# Altium PCB breaker.PcbDoc (part 1 of 2)
Units mil, origin at the board's own origin, x right, y up, seen from the top; angles counter-clockwise.
Board outline 1955 x 4025 mil, 2 copper layers (Top Layer, Bottom Layer); 93 components, 54 nets, 301 pads, 212 vias.
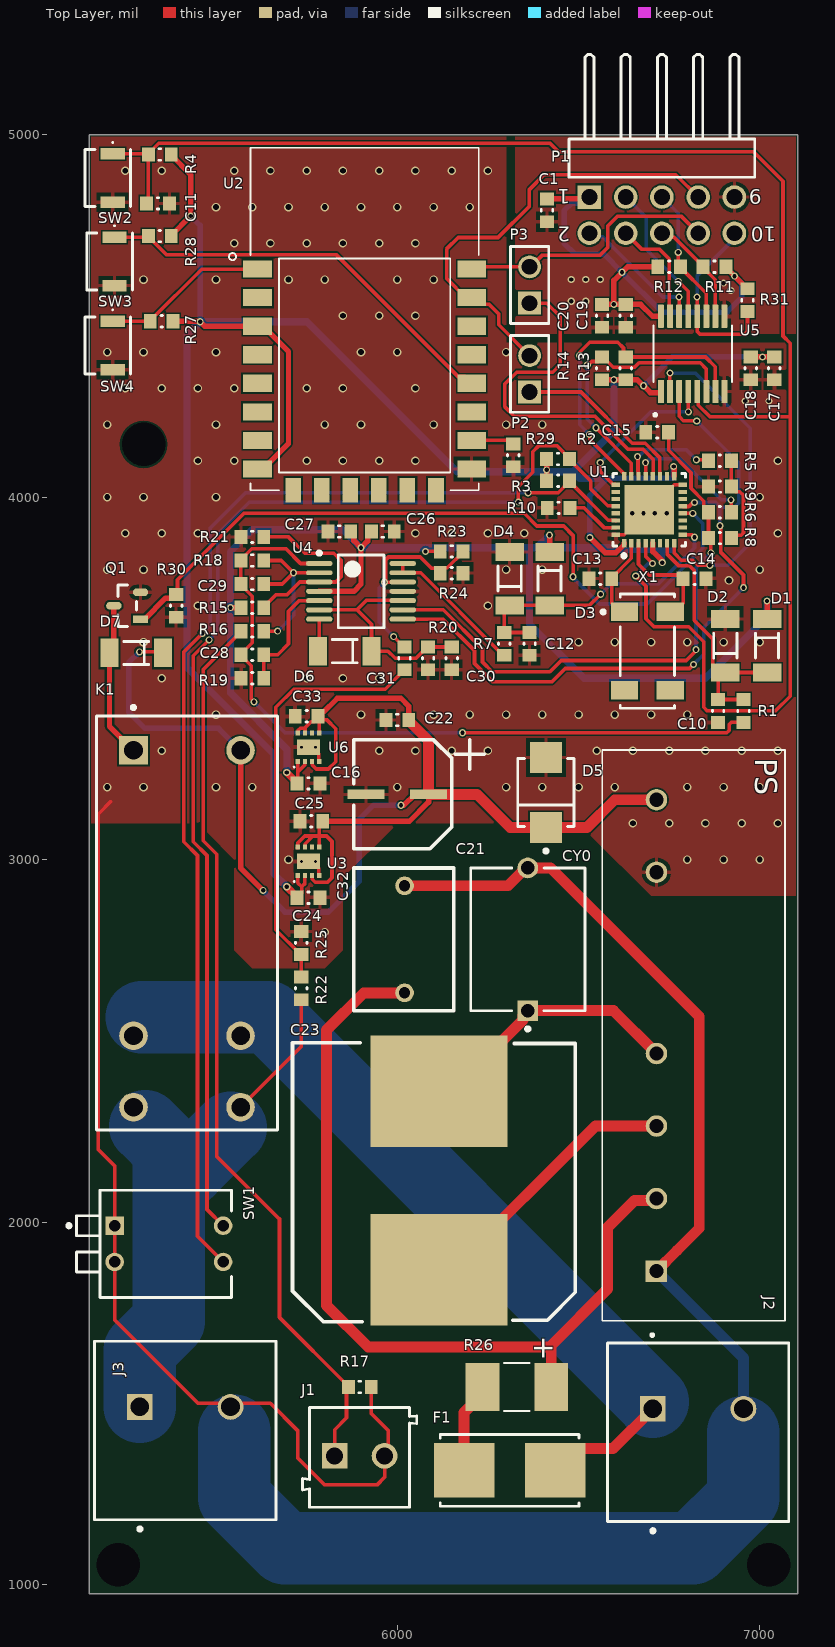
[diagram p0: Top Layer view]
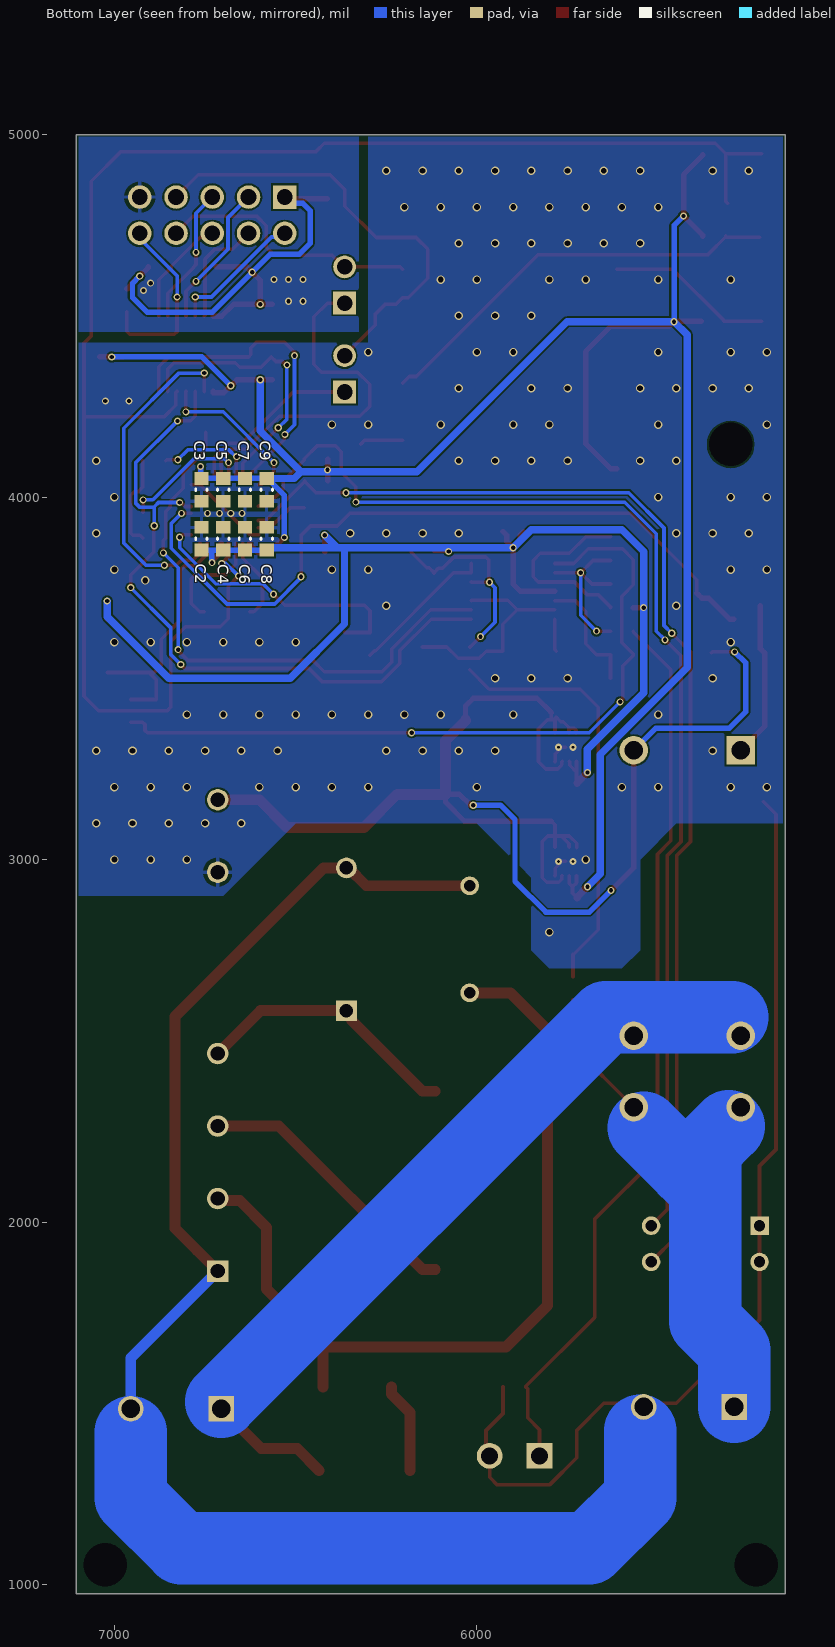
[diagram p1: Bottom Layer view, seen from below]

## Layer stack, top to bottom
Top Solder: solder mask 0.4, Solder Resist, Dk 3.5
Top Layer: signal copper 1.4
Dielectric 1: dielectric 12.6, FR-4, Dk 4.8
Bottom Layer: signal copper 1.4
Bottom Solder: solder mask 0.4, Solder Resist, Dk 3.5

## Board outline
5150,975 7105,975 7105,5000 5150,5000

## Design rules (kind name [scope] priority, off if disabled: settings)
BoardOutlineClearance [All] p1: gap=6 ignorepadtopadclearanceinfootprint=FALSE
Clearance [All] p1: gap=5 ignorepadtopadclearanceinfootprint=FALSE
HoleSize [All] p1: absolutevalues=TRUE maxlimit=3937.01 minlimit=11.81 maxpercent=80.000 minpercent=20.000
MinimumSolderMaskSliver [All] p1: minsoldermaskwidth=0
PolygonConnect [All] p1: thpad.connectstyle=Relief thpad.reliefconductorwidth=10 thpad.reliefentries=4 thpad.polygonreliefangle="90 Angle" thpad.airgapwidth=10 smdpad.connectstyle=Relief smdpad.reliefconductorwidth=10 smdpad.reliefentries=4 smdpad.polygonreliefangle="90 Angle" smdpad.airgapwidth=10 via.connectstyle=Direct via.reliefconductorwidth=10 via.reliefentries=4 via.polygonreliefangle="90 Angle" via.airgapwidth=10
RoutingVias [All] p1: holewidth=28 width=50 viastyle="Through Hole" minholewidth=0 minwidth=0 maxholewidth=28 maxwidth=50
SilkToSilkClearance [All] p1: silktosilkclearance=0
SilkToSolderMaskClearance [IsPad] p1: minsilkscreentomaskgap=2 clearancetoexposedcopper=TRUE
SolderMaskExpansion [All] p1: expansion=4 istentingtop=FALSE
Width [All] p1: maxlimit=500 minlimit=6 preferedwidth=10
26 further rules are at their usual default settings.

## Classes and differential pairs
component class power: C16 C21 C22 C23 C24 C25 C32 C33 CY0 D5 F1 PS R U3
component class controller: C1 C2 C3 C4 C5 C6 C7 C8 C9 C10 C11 C12 C13 C14 C15 C17 C18 C19 C20 D1 D2 D3 D4 P1 P2 P3 R1 R2 R3 R4 R5 R6 R7 R8 R9 R10 R11 R12 R13 R14 R27 R28 R29 SW1 SW2 SW3 SW4 U1 U5 X1
component class circuit_breaker: C26 C27 C28 C29 C30 C31 D6 D7 J1 J3 K1 Q1 R15 R16 R17 R18 R19 R20 R21 R22 R23 R24 R25 R30 U4

## Components (designator, comment, footprint, x,y, rotation, side; value= is the part's Value field where it differs from the comment)
C1 "06033C102JAT2A" 0603C 6413,4791 r90 top value=1000pF
C2 "0603YD105MAT2A" 0603C 6760,3885 r90 bottom value=1uF
C3 "0603YD105MAT2A" 0603C 6760,4020 r270 bottom value=1uF
C4 "06033C104K4T4A" 0603C 6700,3885 r90 bottom value=0.1uF
C5 "06033C104K4T4A" 0603C 6700,4020 r270 bottom value=0.1uF
C6 "06033C102JAT2A" 0603C 6640,3885 r270 bottom value=1000pF
C7 "06033C102JAT2A" 0603C 6640,4020 r90 bottom value=1000pF
C8 "06033A101FAT2A" 0603C 6580,3885 r90 bottom value=100pF
C9 "06033A101FAT2A" 0603C 6580,4020 r270 bottom value=100pF
C10 "06033C102JAT2A" 0603C 6885,3410 r90 top value=1000pF
C11 "06033C104K4T4A" 0603C 5340,4810 r180 top value=0.1uF
C12 "06033C102JAT2A" 0603C 6365,3595 r90 top value=1000pF
C13 "06032U4R3BAT2A" 0603C 6560,3775 r0 top value=4.3pF
C14 "06032U4R3BAT2A" 0603C 6820,3775 r180 top value=4.3pF
C15 "06033C102JAT2A" 0603C 6717,4179 r0 top value=1000pF
C16 "0603YD105MAT2A" 0603C 5755,3210 r180 top value=1uF
C17 "0603YD105MAT2A" 0603C 7040,4355 r270 top value=1uF
C18 "06033C104K4T4A" 0603C 6975,4355 r270 top value=0.1uF
C19 "0603YD105MAT2A" 0603C 6630,4500 r90 top value=1uF
C20 "06033C104K4T4A" 0603C 6565,4500 r90 top value=0.1uF
C21 "EXV227M016A9HAA" small_boi 6000,3180 r0 top value=220uF
C22 "06033C104K4T4A" 0603C 6000,3385 r0 top value=0.1uF
C23 "MAL215299704E3" PCBComponent_1 6115,2115 r270 top value=10uF
C24 "0603YD105MAT2A" 0603C 5755,2895 r180 top value=1uF
C25 "0603YD105MAT2A" 0603C 5762.78,3105.68 r0 top value=1uF
C26 "0603YD105MAT2A" 0603C 5960,3905 r180 top value=1uF
C27 "06033C104K4T4A" 0603C 5840,3905 r180 top value=0.1uF
C28 "0603YD105MAT2A" 0603C 5600,3565 r0 top value=1uF
C29 "CC0603KRNPO9BN470" 0603C 5600,3760 r180 top value=47pF
C30 "06033C104K4T4A" 0603C 6150,3555 r90 top value=0.1uF
C31 "0603YD105MAT2A" 0603C 6020,3555 r90 top value=1uF
C32 "104MKP275KC" 1.083FILM 6020,2780 r270 top value=0.1uF
C33 "0603YD105MAT2A" 0603C 5750,3395 r0 top value=1uF
CY0 "C941U102KVYDCA7317" MURA-DE1E3KX222MA5 6360,2780 r90 top
D1 "TMMBAT48FILM" FP-MINIMELF-MFG 7020,3590 r270 top value=20pF
D2 "TMMBAT48FILM" FP-MINIMELF-MFG 6905,3590 r90 top value=20pF
D3 "TMMBAT48FILM" FP-MINIMELF-MFG 6420,3775 r270 top value=20pF
D4 "TMMBAT48FILM" FP-MINIMELF-MFG 6310,3775 r90 top value=20pF
D5 "SMBJ7.0A" FP-SMBJ-MFG 6410,3185 r90 top
D6 "TMMBAT48FILM" FP-MINIMELF-MFG 5855,3575 r180 top value=20pF
D7 "TMMBAT48FILM" FP-MINIMELF-MFG 5280,3570 r180 top value=20pF
F1 "0154.250DR" FP-0154-MFG 6310,1315 r180 top
J1 "691103110002" 691103110002 5896.1,1351.06 r0 top
J2 "1714955" PHOE-1714955_V 6830,1485 r0 top
J3 "1714955" PHOE-1714955_V 5415,1490 r0 top
K1 "G2RL-1A-E2-CV-HA DC5" FP-G2RL-1A-E2-CV-HA-MFG 5420,2825 r270 top
P1 "61301021021" 61301021021 6730,4935 r180 top
P2 "61300211121" 61300211121 6365,4340 r90 top
P3 "61300211121" 61300211121 6365,4585 r90 top
PS "PBO-5-S5" CONV_PBO-5-S5 6715,2515 r90 top
Q1 "NDS355AN" FP-527AG-01-IPC_C 5255,3700 r180 top
R1 "ERA-3AEB221V" 0603R 6955,3410 r270 top value=220
R2 "ERA-3ARB103V" 0603R 6443.5,4105 r180 top value=10k
R3 "ERA-3ARB103V" 0603R 6443.5,4045 r180 top value=10k
R4 "ERA-3ARB103V" 0603R 5345,4945 r0 top value=10k
R5 "ERA-3ARW202V" 0603R 6890,4100 r180 top value=2k
R6 "ERA-3ARW202V" 0603R 6890,3957.93 r0 top value=2k
R7 "ERA-3AEB221V" 0603R 6295,3595 r270 top value=220
R8 "ERJ-PB3D1001V" 0603R 6890,3886.9 r0 top value=1k
R9 "ERA-3ARW202V" 0603R 6890,4028.97 r180 top value=2k
R10 "ERA-3ARB103V" 0603R 6445,3970 r0 top value=10k
R11 "ERA-3ARW202V" 0603R 6875,4635 r0 top value=2k
R12 "ERA-3ARW202V" 0603R 6750,4635 r180 top value=2k
R13 "ERA-3ARW202V" 0603R 6630,4355 r270 top value=2k
R14 "ERA-3ARW202V" 0603R 6565,4355 r270 top value=2k
R15 "ERA-3APB302V" 0603R 5600,3695 r180 top value=3k
R16 "ERA-3ARB103V" 0603R 5600,3630 r0 top value=10k
R17 "RMCF0603JT22R0" 0603R 5896.5,1545 r180 top value=22
R18 "ERA-3ARB103V" 0603R 5600,3825 r180 top value=10k
R19 "ERA-3ARB103V" 0603R 5600,3500 r0 top value=10k
R20 "ERJ-PB3D1001V" 0603R 6085,3555 r90 top value=1k
R21 "ERJ-PB3D1001V" 0603R 5600,3890 r0 top value=1k
R22 "ERJ-3GEYJ105V" 0603R 5735,2645 r270 top value=1M
R23 "ERJ-3GEYJ105V" 0603R 6150,3850 r180 top value=1M
R24 "ERJ-3GEYJ105V" 0603R 6150,3790 r180 top value=1M
R25 "ERJ-3EKF1692V" 0603R 5735,2770 r270 top value=6.9k
R26 "352212RJT" RESC6332X120N 6330,1545 r0 top
R27 "ERA-3ARB103V" 0603R 5350,4485 r0 top value=10k
R28 "ERA-3ARB103V" 0603R 5345,4720 r0 top value=10k
R29 "ERA-3ARB103V" 0603R 6320,4115 r90 top value=10k
R30 "ERA-3ARB103V" 0603R 5390,3700 r90 top value=10k
R31 "ERA-3ARB103V" 0603R 6966,4543 r90 top value=10k
SW1 "1571999-1" FP-1571999-1-MFG 5370,1940 r0 top
SW2 "B3U-3000P" OMRON-B3U-3000P_V 5215,4880 r270 top
SW3 "B3U-3000P" OMRON-B3U-3000P_V 5220,4650 r270 top
SW4 "B3U-3000P" OMRON-B3U-3000P_V 5215,4418.07 r270 top
U1 "STM32L412KBU6" FP-UFQFPN32-A0B8-MFG 6695,3965 r90 top
U2 "ESP8266-12E/ESP-12E" XCVR_ESP8266-12E/ESP-12E 5909.72,4353.15 r0 top
U3 "ADP124ACPZ-3.3-R7" ADI-CP-8-8_V 5755,2995 r90 top
U4 "AD8604ARUZ" ADI-RU-14_M 5900,3740 r0 top
U5 "MAX14850AEE+" SOP63P602X175-16N 6815,4395 r90 top
U6 "ADP124ACPZ-3.3-R7" ADI-CP-8-8_V 5755,3310 r90 top
X1 "ABS25-32.768KHZ-6-T" ABRA-ABS25-4_V 6690,3575 r270 top

## Footprints (in the part's own frame and the unit in brackets; to place one, negate y for a bottom-side part, rotate by r counter-clockwise, add the part's x,y. Pads: shape width x height; smd on the part's side, far side on the other; paste and mask are expansions set on the pad)
1.083FILM [mm]
  round 1.308 hole 0.8: 1(-3.75,0) 2(3.75,0)
  silkscreen extent -5,-3.56 5,3.44
0603C [mm] "Chip Capacitor, Body 1.6x0.8mm, Height 1.0mm, IPC Medium Density"
  rect 0.9x1 smd: 1(-0.8,0) 2(0.8,0)
  silkscreen extent -0.05,-0.4 0.05,0.4, body extent -0.87,-0.48 0.88,0.47, height 1
0603R [mm] "Chip Resistor, Body 1.6x0.8mm, IPC Medium Density"
  rect 0.9x1 smd: 1(-0.8,0) 2(0.8,0)
  silkscreen extent -0.05,-0.4 0.05,0.4, body extent -0.85,-0.47 0.85,0.47, height 0.6
61300211121 [mm] "Pin Header, pitch 2.54 mm, THT, Vertical, single row, 2p"
  rect 1.6x1.6 hole 1.1: 1(-1.27,0)
  round 1.6 hole 1.1: 2(1.27,0)
  silkscreen extent -2.69,-1.35 2.69,1.35, body extent -2.54,-1.27 2.54,1.27, height 8.57
61301021021 [mm] "Pin Header, pitch 2.54 mm, THT, Angled, dual row, 10p"
  rect 1.65x1.65 hole 1.1: 1(5.08,2.73)
  round 1.65 hole 1.1: 2(5.08,5.27) 3(2.54,2.73) 4(2.54,5.27) 5(0,2.73) 6(0,5.27) 7(-2.54,2.73) 8(-2.54,5.27) 9(-5.08,2.73) 10(-5.08,5.27)
  silkscreen extent -6.5,-7.27 6.5,1.35, body extent -6.35,-7.27 6.35,5.63, height 5.12
691103110002 [mm] "3,50mm - modular - blue - Horizontal wire entry - Pressure clamp - 8,4mm height - 02p"
  rect 1.8x1.8 hole 1.2: 1(-1.75,0.1)
  round 1.8 hole 1.2: 2(1.75,0.1)
  silkscreen extent -4,-3.5 4,3.5, body extent -4,-3.5 4,3.5, height 8.45
ABRA-ABS25-4_V [mm] "SMD, 4-Leads, Body 8x3.8mm, Pitch 5.5mm, Height 2.5mm"
  rect 1.3x1.9 smd: 1(-2.75,-1.6) 2(2.75,-1.6) 3(2.75,1.6) 4(-2.75,1.6)
  silkscreen extent -4,-3.22 4,1.9, body extent -4,-2 4,2, height 2.66
ADI-CP-8-8_V [mm] "SON, 8-Leads, Body 2x2mm, Pitch 0.5mm, Thermal Pad 1.6x1mm"
  rect 0.35x0.3 smd: 1(-1,0.75) 2(-1,0.25) 3(-1,-0.25) 4(-1,-0.75) 5(1,-0.75) 6(1,-0.25) 7(1,0.25) 8(1,0.75)
  rect 1.1x1.6 smd: 9(0,0)
  silkscreen extent -1.45,0.95 -1.35,1.05, body extent -1,-1 1,1, height 0.65
ADI-RU-14_M [mm] "SOP, 14-Leads, Body 5x4.4mm, Pitch 0.65mm, IPC Low Density"
  oval 1.85x0.35 smd: 1(-2.925,1.95) 2(-2.925,1.3) 3(-2.925,0.65) 4(-2.925,0) 5(-2.925,-0.65) 6(-2.925,-1.3) 7(-2.925,-1.95) 8(2.925,-1.95) 9(2.925,-1.3) 10(2.925,-0.65) 11(2.925,0) 12(2.925,0.65) 13(2.925,1.3) 14(2.925,1.95)
  silkscreen extent -3.05,-2.55 1.6,2.8, body extent -2.25,-2.55 2.25,2.55, height 1.2
CONV_PBO-5-S5 [mm]
  rect 1.508x1.508 hole 1: 1(-16.51,0)
  round 1.508 hole 1: 3(-11.43,0) 5(-6.35,0) 7(-1.27,0) 12(11.43,0) 14(16.51,0)
  silkscreen extent -21.1,-9 20,3.8
FP-0154-MFG [mil]
  rect 167x150 smd paste+0 mask+0: 1(-125.5,0) 2(125.5,0)
  silkscreen extent -192,-99 192,99, body extent -213,-103 213,103, height 10
FP-527AG-01-IPC_C [mm]
  rect 1.075x0.538 smd paste+0 mask+0: 1(-0.935,0.95)
  rrect100% 1.075x0.538 smd paste+0 mask+0: 2(-0.935,-0.95) 3(0.935,0)
  silkscreen extent -0.65,-1.46 0.65,1.46, body extent -1.2,-1.46 1.2,1.44, height 1.11
FP-1571999-1-MFG [mm]
  rect 1.3x1.3 hole 0.8 paste-1000 mask+0: 1(-3.8,1.27)
  round 1.3 hole 0.8 paste-1000 mask+0: 2(-3.8,-1.27) 3(3.8,-1.27) 4(3.8,1.27)
  silkscreen extent -7.13,-3.75 4.39,3.75, body extent -6.59,-3.85 4.55,3.85, height 0.25
FP-G2RL-1A-E2-CV-HA-MFG [mm]
  rect 2x2 hole 1.3 paste-1000 mask+0: 1(-12.1,-3.75)
  round 2 hole 1.3 paste-1000 mask+0: 3(7.9,-3.75) 4(12.9,-3.75) 5(12.9,3.75) 6(7.9,3.75) 8(-12.1,3.75)
  silkscreen extent -15.22,-6.35 14.5,6.35, body extent -14.6,-6.45 14.6,6.45, height 0.25
FP-MINIMELF-MFG [mm]
  rect 1.25x2 smd paste+0 mask+0: 1(-1.875,0) 2(1.875,0)
  silkscreen extent -0.87,-0.81 0.87,0.81, body extent -2.6,-1.1 2.6,1.1, height 0.25
FP-SMBJ-MFG [mm]
  rect 2.16x2.26 smd paste+0 mask+0: 1(-2.45,0) 2(2.45,0)
  silkscreen extent -4.22,-1.97 2.37,1.97, body extent -3.63,-2.07 3.63,2.07, height 0.25
FP-UFQFPN32-A0B8-MFG [mm]
  rect 0.6x0.3 smd paste+0 mask+0: 1(-2.35,1.75) 2(-2.35,1.25) 3(-2.35,0.75) 4(-2.35,0.25) 5(-2.35,-0.25) 6(-2.35,-0.75) 7(-2.35,-1.25) 8(-2.35,-1.75) 17(2.35,-1.75) 18(2.35,-1.25) 19(2.35,-0.75) 20(2.35,-0.25) 21(2.35,0.25) 22(2.35,0.75) 23(2.35,1.25) 24(2.35,1.75)
  rect 0.3x0.6 smd paste+0 mask+0: 9(-1.75,-2.35) 10(-1.25,-2.35) 11(-0.75,-2.35) 12(-0.25,-2.35) 13(0.25,-2.35) 14(0.75,-2.35) 15(1.25,-2.35) 16(1.75,-2.35) 25(1.75,2.35) 26(1.25,2.35) 27(0.75,2.35) 28(0.25,2.35) 29(-0.25,2.35) 30(-0.75,2.35) 31(-1.25,2.35) 32(-1.75,2.35)
  rect 3.45x3.45 smd paste+0 mask+0: 33(0,0)
  silkscreen extent -3.35,-2.55 2.55,2.55, body extent -2.75,-2.75 2.75,2.75, height 0.25
MURA-DE1E3KX222MA5 [mm] "THD, 2-Leads, Dia 10mm"
  rect 1.45x1.45 hole 0.95: 1(-5,0)
  round 1.45 hole 0.95: 2(5,0)
  silkscreen extent -6.4,-4 5,4, body extent -5,-4 5,4, height 14
OMRON-B3U-3000P_V [mm] "SMD, 2-Leads, Body 4x3.2mm"
  rect 0.8x1.7 smd: 1(-1.7,0) 2(1.7,0)
  silkscreen extent -2.55,-1.95 2,1.25, body extent -2,-1.95 2,1.25, height 1.2
PCBComponent_1 [mm]
  rect 7.8x9.6 smd: 1(6.25,0) 2(-6.25,0)
  silkscreen extent -9.64,-10.26 9.89,9.55
PHOE-1714955_V [mm] "Terminal Block, 2-Leads, Body 12.7x12.5mm, Pitch 6.35mm"
  rect 1.8x1.8 hole 1.3: 1(-3.175,0)
  round 1.8 hole 1.3: 2(3.175,0)
  silkscreen extent -6.35,-8.67 6.35,4.6, body extent -6.92,-7.9 6.35,4.6, height 21.51
RESC6332X120N [mm]
  rect 2.37x3.37 smd: 1(-2.405,0) 2(2.405,0)
  silkscreen extent -0.9,-1.68 0.9,1.68
small_boi [mm]
  rect 2.6x0.65 smd: 1(2.2,0) 2(-2.2,0)
  silkscreen extent -3.05,-3.81 6.1,3.81
SOP63P602X175-16N [mm]
  rrect25% 1.64x0.41 smd: 1(-2.635,2.222) 2(-2.635,1.587) 3(-2.635,0.952) 4(-2.635,0.317) 5(-2.635,-0.318) 6(-2.635,-0.953) 7(-2.635,-1.588) 8(-2.635,-2.222) 9(2.635,-2.222) 10(2.635,-1.587) 11(2.635,-0.952) 12(2.635,-0.317) 13(2.635,0.318) 14(2.635,0.953) 15(2.635,1.588) 16(2.635,2.222)
  silkscreen extent -4.37,-2.75 1.99,2.75
XCVR_ESP8266-12E/ESP-12E [mm]
  rect 2x1.2 smd: 1(-7.5,7) 2(-7.5,5) 3(-7.5,3) 4(-7.5,1) 5(-7.5,-1) 6(-7.5,-3) 7(-7.5,-5) 8(-7.5,-7) 15(7.5,-7) 16(7.5,-5) 17(7.5,-3) 18(7.5,-1) 19(7.5,1) 20(7.5,3) 21(7.5,5) 22(7.5,7)
  rect 1.1x1.7 smd: 9(-5,-8.5) 10(-3,-8.5) 11(-1,-8.5) 12(1,-8.5) 13(3,-8.5) 14(5,-8.5)
  silkscreen extent -9.5,-8.5 8,15.5, body extent -8,-8.51 8,15.49, height 3

## Part data
C1 C6 C7 C10 C12 C15: "0603 1 nF 25 V ±5 % Tolerance X7R Surface Mount Multilayer Ceramic Capacitor", Capacitance=1nF, Case Code (Imperial)=0603, Case Code (Metric)=1608, Dielectric=X7R, Manufacturer="Kyocera AVX", Max Operating Temperature=125°C, Min Operating Temperature=-55°C, Package Quantity=1, Supplier Part Number 1=478-10673-1-ND, Tolerance=5%, Voltage Rating=25V, Case/Package=0603, Category="Ceramic Capacitors", ComponentLink1Description=https://datasheet.ciiva.com/206/cx7r-206114.pdf?src-supplier=Digi-Key, ComponentLink1URL=https://datasheet.ciiva.com/206/cx7r-206114.pdf?src-supplier=Digi-Key, ComponentLink2Description=https://datasheet.ciiva.com/14886/cx7r-14886873.pdf?src-supplier=Digi-Key, ComponentLink2URL=https://datasheet.ciiva.com/14886/cx7r-14886873.pdf?src-supplier=Digi-Key, ComponentLink3Description=https://datasheet.ciiva.com/14886/cx7r-14886874.pdf?src-supplier=Digi-Key, ComponentLink3URL=https://datasheet.ciiva.com/14886/cx7r-14886874.pdf?src-supplier=Digi-Key, ComponentLink4Description=https://datasheet.ciiva.com/5422/cx7r-218113-5422101.pdf?src-supplier=Mouser, ComponentLink4URL=https://datasheet.ciiva.com/5422/cx7r-218113-5422101.pdf?src-supplier=Mouser, ComponentLink5Description=https://datasheet.ciiva.com/16327/cx7r-16327167.pdf?src-supplier=Future+Electronics, ComponentLink5URL=https://datasheet.ciiva.com/16327/cx7r-16327167.pdf?src-supplier=Future+Electronics, Construction=Flat, Depth=0.81mm, Lead Free="Lead Free", Length=1.6mm, Manufacturer Part Number=06033C102JAT2A, Mount="Surface Mount", Number of Pins=2, Packaging="Tape and Reel", Pricing 2="1=0.27000, 10=0.18600, 50=0.12420, 100=0.10560, 500=0.07452, 1000=0.06520 (USD)", REACH SVHC=Unknown, RoHS=Yes, RoHS Compliant=Yes, Series=-, Stock 2=72865, Supplier 2=Digi-Key, Supplier Part Number 2=478-7900-1-ND, Termination=SMD/SMT, Thickness=0.035inch, Voltage Rating (DC)=25V, Width=0.032inch
C2 C3 C17 C19: "AVX - 0603YD105MAT2A - Keramikvielschichtkondensator, SMD, 1 µF, 16 V, 0603 [Metrisch 1608], ± 20%, X5R, AVX 0603 MLCC", Capacitance=1uF, Case Code (Imperial)=0603, Case Code (Metric)=1608, Dielectric=X5R, Manufacturer="Kyocera AVX", Max Operating Temperature=85°C, Min Operating Temperature=-55°C, Package Quantity=4000, Supplier Part Number 1=478-10673-1-ND, Tolerance=20%, Voltage Rating=16V, Case/Package=0603, Category="Ceramic Capacitors", ComponentLink1Description=https://datasheet.ciiva.com/151/cx5r-151029.pdf?src-supplier=Digi-Key, ComponentLink1URL=https://datasheet.ciiva.com/151/cx5r-151029.pdf?src-supplier=Digi-Key, ComponentLink2Description=https://datasheet.ciiva.com/151/cx5r-151030.pdf?src-supplier=Digi-Key, ComponentLink2URL=https://datasheet.ciiva.com/151/cx5r-151030.pdf?src-supplier=Digi-Key, ComponentLink3Description=https://datasheet.ciiva.com/151/cx5r-151031.pdf?src-supplier=Digi-Key, ComponentLink3URL=https://datasheet.ciiva.com/151/cx5r-151031.pdf?src-supplier=Digi-Key, ComponentLink4Description=https://datasheet.ciiva.com/22682/1666675-22682860.pdf?src-supplier=Element14, ComponentLink4URL=https://datasheet.ciiva.com/22682/1666675-22682860.pdf?src-supplier=Element14, ComponentLink5Description=https://datasheet.ciiva.com/28586/1666675-28586031.pdf?src-supplier=Element14, ComponentLink5URL=https://datasheet.ciiva.com/28586/1666675-28586031.pdf?src-supplier=Element14, Construction=Flat, Depth=0.81mm, Dissipation Factor=3.5%, Height=0.9mm, Lead Free="Lead Free", Length=1.6mm, Manufacturer Part Number=0603YD105MAT2A, Mount="Surface Mount", Number of Pins=2, Packaging="Tape and Reel", Pricing 2="1=0.17000, 10=0.12100, 50=0.06880, 100=0.05700, 500=0.03998, 1000=0.03310 (USD)", Radiation Hardening=No, REACH SVHC="No SVHC", RoHS=Yes, RoHS Compliant=Yes, Series=-, Stock 2=32400, Supplier 2=Digi-Key, Supplier Part Number 2=478-5319-1-ND, Termination=SMD/SMT, Thickness=0.035inch, Voltage Rating (DC)=16V, Width=0.032inch
C4 C5 C11 C18 C20 C22 C27 C30: "Cap Ceramic 0.1uF 25V X7R 10% Pad SMD 0603 125C Automotive T/R", Capacitance=100nF, Case/Package=0603, Dielectric=X7R, Manufacturer="Kyocera AVX", Max Operating Temperature=125°C, Min Operating Temperature=-55°C, Supplier Part Number 1=478-10673-1-ND, Tolerance=10%, Voltage Rating (DC)=25V, Category="Ceramic Capacitors", ComponentLink1Description=https://datasheet.ciiva.com/11503/cauto-11503964.pdf?src-supplier=Avnet, ComponentLink1URL=https://datasheet.ciiva.com/11503/cauto-11503964.pdf?src-supplier=Avnet, Construction=Flat, Depth=0.81mm, Length=1.6mm, Manufacturer Part Number=06033C104K4T4A, Mount="Surface Mount", Packaging="Tape and Reel", Pricing 2="1=0.15000, 10=0.11000, 50=0.06220, 100=0.05150, 500=0.03612, 1000=0.02991, 2500=0.02784, 5000=0.02547 (USD)", RoHS=Yes, Stock 2=4996, Supplier 2=Digi-Key
C8 C9: "Multilayer Ceramic Capacitors MLCC - SMD/SMT 25V 100pF C0G 0603 1% Tol", Capacitance=100pF, Case Code (Imperial)=0603, Case Code (Metric)=1608, Dielectric=C0G, Manufacturer="Kyocera AVX", Max Operating Temperature=125°C, Min Operating Temperature=-55°C, Package Quantity=4000, Supplier Part Number 1=478-10673-1-ND, Tolerance=1%, Voltage Rating=25V, Case/Package=0603, Category="Ceramic Capacitors", ComponentLink1Description=https://datasheet.ciiva.com/209/ccog-209628.pdf?src-supplier=Digi-Key, ComponentLink1URL=https://datasheet.ciiva.com/209/ccog-209628.pdf?src-supplier=Digi-Key, Construction=Flat, Depth=0.81mm, Height=0.13mm, Length=1.6mm, Manufacturer Part Number=06033A101FAT2A, Mount="Surface Mount", Packaging="Tape and Reel", Pricing 2="1=0.50000, 10=0.34500, 50=0.24160, 100=0.20700, 500=0.15524, 1000=0.13110 (USD)", Radiation Hardening=No, RoHS=Yes, RoHS Compliant=Yes, Series=0603, Stock 2=17449, Supplier 2=Digi-Key, Supplier Part Number 2=478-06033A101FAT2ACT-ND, Termination=SMD/SMT, Thickness=0.035inch, Voltage Rating (DC)=25V, Weight=7.1E-05oz, Width=0.81mm
C13 C14: "CAP CER 4.3PF 200V NP0 0603", Capacitance=4.3pF, Case Code (Imperial)=0603, Case Code (Metric)=1608, Dielectric=C0G, Manufacturer="Kyocera AVX", Max Operating Temperature=125°C, Min Operating Temperature=-55°C, Package Quantity=8000, Resistor Type=Ceramic, Supplier Part Number 1=478-10673-1-ND, Voltage Rating=200V, Case/Package=0603, Category="Ceramic Capacitors", ComponentLink1Description=https://datasheet.ciiva.com/207/useries-207438.pdf?src-supplier=Digi-Key, ComponentLink1URL=https://datasheet.ciiva.com/207/useries-207438.pdf?src-supplier=Digi-Key, ComponentLink2Description=https://datasheet.ciiva.com/11570/useries-11570909.pdf?src-supplier=Avnet, ComponentLink2URL=https://datasheet.ciiva.com/11570/useries-11570909.pdf?src-supplier=Avnet, Construction=Flat, Depth=0.76mm, Length=0.06inch, Manufacturer Part Number=06032U4R3BAT2A, Mount="Surface Mount", Packaging="Tape and Reel", Pricing 2="1=0.35000, 10=0.24200, 50=0.16100, 100=0.13680, 500=0.09660, 1000=0.08452 (USD)", Radiation Hardening=No, RoHS=Yes, RoHS Compliant=Yes, Series=U, Stock 2=15764, Supplier 2=Digi-Key, Supplier Part Number 2=478-10269-1-ND, Termination=SMD/SMT, Thickness=0.036inch, Voltage Rating (DC)=200V, Width=0.81mm
C16 C24 C25 C26 C28 C31 C33: "AVX - 0603YD105MAT2A - Keramikvielschichtkondensator, SMD, 1 µF, 16 V, 0603 [Metrisch 1608], ± 20%, X5R, AVX 0603 MLCC", Capacitance=1uF, Case Code (Imperial)=0603, Case Code (Metric)=1608, Dielectric=X5R, Manufacturer="Kyocera AVX", Max Operating Temperature=85°C, Min Operating Temperature=-55°C, Package Quantity=4000, Supplier Part Number 1=478-5319-1-ND, Tolerance=20%, Voltage Rating=16V, Case/Package=0603, Category="Ceramic Capacitors", ComponentLink1Description=https://datasheet.ciiva.com/151/cx5r-151029.pdf?src-supplier=Digi-Key, ComponentLink1URL=https://datasheet.ciiva.com/151/cx5r-151029.pdf?src-supplier=Digi-Key, ComponentLink2Description=https://datasheet.ciiva.com/151/cx5r-151030.pdf?src-supplier=Digi-Key, ComponentLink2URL=https://datasheet.ciiva.com/151/cx5r-151030.pdf?src-supplier=Digi-Key, ComponentLink3Description=https://datasheet.ciiva.com/151/cx5r-151031.pdf?src-supplier=Digi-Key, ComponentLink3URL=https://datasheet.ciiva.com/151/cx5r-151031.pdf?src-supplier=Digi-Key, ComponentLink4Description=https://datasheet.ciiva.com/22682/1666675-22682860.pdf?src-supplier=Element14, ComponentLink4URL=https://datasheet.ciiva.com/22682/1666675-22682860.pdf?src-supplier=Element14, ComponentLink5Description=https://datasheet.ciiva.com/28586/1666675-28586031.pdf?src-supplier=Element14, ComponentLink5URL=https://datasheet.ciiva.com/28586/1666675-28586031.pdf?src-supplier=Element14, Construction=Flat, Depth=0.81mm, Dissipation Factor=3.5%, Height=0.9mm, Lead Free="Lead Free", Length=1.6mm, Manufacturer Part Number=0603YD105MAT2A, Mount="Surface Mount", Number of Pins=2, Packaging="Tape and Reel", Pricing 2="1=0.17000, 10=0.12100, 50=0.06880, 100=0.05700, 500=0.03998, 1000=0.03310 (USD)", Radiation Hardening=No, REACH SVHC="No SVHC", RoHS=Yes, RoHS Compliant=Yes, Series=-, Stock 2=32400, Supplier 2=Digi-Key, Termination=SMD/SMT, Thickness=0.035inch, Voltage Rating (DC)=16V, Width=0.032inch
C21: "Aluminum electrolytic capacitor, 220uF, 16V", Manufacturer=KEMET, Manufacturer Part Number=C0603C103K3TACAUTO, Supplier Part Number 1=399-EXV227M016A9HAACT-ND, Pricing 2="1=0.45000, 10=0.31800, 50=0.24080, 100=0.20970, 500=0.15532, 1000=0.13202 (USD)", RoHS=No, Stock 2=10862
C23: "Aluminum Electrolitic Capacitor, 10uF, 450Vac", Manufacturer=KEMET, Manufacturer Part Number=C0603C103K3TACAUTO, Supplier Part Number 1=56-MAL215299704E3CT-ND, Pricing 2="1=0.45000, 10=0.31800, 50=0.24080, 100=0.20970, 500=0.15532, 1000=0.13202 (USD)", RoHS=No, Stock 2=10862
C29: "Cap Ceramic 47pF 50V C0G 10% SMD 0603 125C Paper T/R", Capacitance=47pF, Case Code (Imperial)=0603, Case Code (Metric)=1608, Dielectric=C0G, Manufacturer=Yageo, Max Operating Temperature=125°C, Min Operating Temperature=-55°C, Resistor Type=Ceramic, Supplier Part Number 1=311-4037-1-ND, Tolerance=10%, Voltage Rating=50V, Case/Package=0603, Category="Ceramic Capacitors", ComponentLink1Description=https://datasheet.ciiva.com/13264/upy-gp-np0-16v-to-50v-8-3714-13264856.pdf?src-supplier=Mouser, ComponentLink1URL=https://datasheet.ciiva.com/13264/upy-gp-np0-16v-to-50v-8-3714-13264856.pdf?src-supplier=Mouser, Construction=Flat, Depth=0.8mm, Height=0.8mm, Length=0.063inch, Manufacturer Part Number=CC0603KRNPO9BN470, Mount="Surface Mount", Packaging="Tape and Reel", Pricing 1="1=0.10000, 10=0.05800, 50=0.03180, 100=0.02600, 500=0.01856, 1000=0.01458 (USD)", Radiation Hardening=No, RoHS=Yes, RoHS Compliant=Yes, Series=CC, Stock 1=9137, Supplier 1=Digi-Key, Termination=SMD/SMT, Thickness=0.035inch, Voltage Rating (DC)=50V, Weight=7.1E-05oz, Width=0.031inch
C32: "Capacitor", Manufacturer=KEMET, Manufacturer Part Number=C0603C103K3TACAUTO, Supplier Part Number 1=399-C0603C103K3TACAUTOCT-ND, Pricing 2="1=0.45000, 10=0.31800, 50=0.24080, 100=0.20970, 500=0.15532, 1000=0.13202 (USD)", RoHS=No, Stock 2=10862, Supplier 2=Digi-Key
CY0: library part CMP-2000-06146-1, "Ceramic Capacitor, 2.2 nF, +/- 20%, 250 V, -25 to 85 degC, 2-Pin THD, RoHS, Bulk", Capacitance=1000pF, Capacitance Tolerance=±20%, Capacitor Application=Safety/Suppression, Capacitor Case Style=Disc, Capacitor Terminals=RadialLeaded, Dielectric Characteristic=E, Manufacturer=Murata, Operating Temperature Max=125°C, Operating Temperature Min=-25°C, Operating Temperature Range=-25°Cto+125°C, Package Description="2-Pin Through Hole Device, Radial, Dia 10 mm, Heigh 14 mm", Package Reference=DE1E3KX222MA5, Proof Voltage=4000V, Tolerance +=20%, Voltage Rating=250VAC, Voltage Rating V AC=250V, Body Diameter=12mm, Datasheet URL=http://www.murata.com/~/media/webrenewal/campaign/ads/america/amr_ami/c85e.ashx?la=en-us, Datasheet Version=04/2014, External Width=10mm, Lead Length=25mm, Lead Spacing=10mm, Manufacturer URL=http://www.murata.com/, Mounting Technology=ThroughHole, No. of Pins=2, Series=KX, Suppression Class=X1/Y1, SVHC=NoSVHC(19-Dec-2012), Tolerance -=20%
D1 D2 D3 D4 D6 D7: library part CMP-12187-000003-1, "DIODE SCHOTTKY 40V 350MA MINMELF", Capacitance=20pF, Forward Current=350mA, Manufacturer=STMicroelectronics, Max Junction Temp=+125°C, Max Repetitive Reverse Voltage=40V, Max Surge Forward Current=1.5A, Package=MINIMELF, Peak Reverse Current=25uA, Temperature="-65°C to +125°C", Temperature Range Low=-65°C, Automotive=No, Category=Diode, ComponentLink2Description=Datasheet, ComponentLink2URL=https://www.st.com/resource/en/datasheet/tmmbat48.pdf, Device Class L1="Discrete Semiconductors", Device Class L2=Diodes, Device Class L3="Schottky Diodes", Digikey Description="DIODE SCHOTTKY 40V 350MA MINMELF", Height=1.62mm, Lead Free=Yes, Manufacturer Part Number=TMMBAT48FILM, Mouser Description="Schottky Diodes & Rectifiers 350mA 40 Volt", Octopart=https://octopart.com/tmmbat48film-stmicroelectronics-324396, Reverse Voltage=40V, RoHS=TRUE, Temperature Range High=+125°C
D5: library part CMP-08607-000042-1, "TVS DIODE 5V 9.2V DO214AA", Breakdown Voltage=6.4V, Clamping Voltage=9.2V, Manufacturer="Littelfuse Inc", Manufacturer Part Number=SMBJ5.0A, Max Junction Temp=+150°C, Package=SMBJ, Peak Pulse Current=65.3A, Peak Pulse Power=600W, Reverse Standoff Voltage=5V, Temperature="-65°C to +150°C", Temperature Range Low=-65°C, Automotive=No, Category=Diode, ComponentLink2Description=Datasheet, ComponentLink2URL=https://www.littelfuse.com/~/media/electronics/datasheets/tvs_diodes/littelfuse_tvs_diode_smbj_datasheet.pdf.pdf, Device Class L1="Circuit Protection", Device Class L2="TVS Diodes", Device Class L3=unset, Digikey Description="TVS DIODE 5V 9.2V DO214AA", Direction=Unidirectional, Height=2.61mm, Lead Free=Yes, Mouser Description="TVSS; Diode; For Data/Comm; Industrial Equip; 65.3A; SMD; Solder Term; Clamp-V 9.2V", Number Of Channels=1, Octopart=https://octopart.com/smbj5.0a-littelfuse-8835, RoHS=TRUE, Temperature Range High=+150°C
F1: library part CMP-08605-000036-1, "FUSE BOARD MNT 250MA 125VAC/VDC", Fuse Current=0.25A, Manufacturer=Littelfuse, Max Fuse Ac Voltage=125V, Package=0154, Temperature="-55°C to +125°C", Temperature Range High=+125°C, Temperature Range Low=-55°C, Automotive=No, Category=Fuse, ComponentLink2Description=Datasheet, ComponentLink2URL=https://www.littelfuse.com/~/media/electronics/datasheets/fuses/littelfuse_fuse_154_154t_154l_154tl_datasheet.pdf.pdf, Device Class L1="Circuit Protection", Device Class L2=Fuses, Device Class L3=unset, Digikey Description="FUSE BOARD MNT 250MA 125VAC/VDC", Fuse Blow Speed=Fast, Fuse I2T=0.0113A2Sec, Height=3.81mm, Lead Free=Yes, Manufacturer Part Number=0154.250DR, Max Fuse Dc Voltage=125V, Mouser Description="Surface Mount Fuses Fuseblck w/ fuse.25A OMNI BLOK 154", Octopart=https://octopart.com/0154.250dr-littelfuse-565851, RoHS=TRUE, Voltage Rating=125V
J1: library part CMP-1502-03254-1, "Series 1031 - 3.50 mm Horizontal Entry Modular with Pressure Clamp WR-TBL, 2 pin", Manufacturer="Wurth Elektronik", Operating Temperature=-40to105degC, Datasheet URL=http://katalog.we-online.de/em/datasheet/6911031100xx.pdf, Manufacturer URL=http://www.we-online.de, Mounting Technology=THT, Package Reference=691103110002, Packaging=Box, Part Number=691103110002, Pin Number=2, Pitch=3.50mm, Publisher=WurthElektronik
J2 J3: library part CMP-2000-05797-1, "PC Terminal Block, Pitch 6.35 mm, 1 x 2 Position, Height 21.5 mm, Tail Lenght 5.1 mm, RoHS, Bulk", Manufacturer="Phoenix Contact", Package Description="PC Terminal Block, Pitch 6.35 mm, 1 x 2 Position, Height 21.5 mm, Tail Lenght 5.1 mm", Datasheet URL=http://media.digikey.com/pdf/Data%20Sheets/Phoenix%20Contact%20PDFs/1714955.pdf, Datasheet Version=02/2010, Manufacturer URL=http://www.phoenixcontact.com/, Mounting Technology=ThroughHole, Package Reference=1714955
K1: library part CMP-08822-000005-1, "RELAY GEN PURPOSE SPST 23A 5V", Ambient Temperature Range High=+105°C, Ambient Temperature Range Low=-40°C, Coil Current=80mA, Coil Power=400mW, Coil Resistance=62.5Ω, Coil Voltage=5V, Current Rating=23A, Manufacturer=Omron, Package=G2RL-1A-E2-CV-HA, Temperature="-40°C to +105°C", Automotive=No, Category=Relay, Coil Type=Non-Latching, ComponentLink2Description=Datasheet, ComponentLink2URL=https://media.digikey.com/pdf/Data%20Sheets/Omron%20PDFs/G2RL-1A-E2-CV-HA%20DC5.pdf, Device Class L1=Electromechanical, Device Class L2=Relays, Device Class L3="Power Relays", Digikey Description="RELAY GEN PURPOSE SPST 23A 5V", Height=16.7mm, Lead Free=Yes, Manufacturer Part Number="G2RL-1A-E2-CV-HA DC5", Number Of Contacts=1, Octopart=https://octopart.com/g2rl-1a-e2-cv-ha+dc5-omron-100806975, RoHS=TRUE, Switching Current=23A, Temperature Range High=+105°C, Temperature Range Low=-40°C, Throw Configuration=SPST-NO
P1: library part CMP-1502-01083-1, "THT Angled Pin Header WR-PHD, Pitch 2.54 mm, Dual Row, 10 pins", Contact Resistance=20mOhm, Manufacturer="Wurth Elektronik", Operating Temperature=-40to105degC, Rated Current=3A, Withstanding Voltage=500VAC, Working Voltage=250VAC, Datasheet URL=https://katalog.we-online.de/em/datasheet/6130xx21021.pdf, Gender=Male, Manufacturer URL=http://www.we-online.de, Mounting Technology=THT, Orientation=Angled, Package Reference=61301021021, Packaging=Bag, Part Number=61301021021, Pin Number=10, Pitch=2.54mm, Publisher=WurthElektronik, Row Number=Dual
P2 P3: library part CMP-1712-00002-4, "THT Vertical Pin Header WR-PHD, Pitch 2.54 mm, Single Row, 2 pins", Contact Resistance=20mOhm, Manufacturer="Wurth Elektronik", Operating Temperature=-40to105degC, Rated Current=3A, Withstanding Voltage=500VAC, Working Voltage=250VAC, Datasheet URL=https://katalog.we-online.de/em/datasheet/6130xx11121.pdf, Gender=Male, Manufacturer URL=http://www.we-online.de, Mounting Technology=THT, Orientation=Vertical, Package Reference=61300211121, Packaging=Bag, Part Number=61300211121, Pin Number=2, Pitch=2.54mm, Publisher=WurthElektronik, Row Number=Single
PS: "5 W, Single Output, Open Frame, Board Mount, Ac-Dc Power Supply", Package=SIP-14, Availability=Unavailable, MF="CUI Inc.", MP=PBO-5-S5, Price=None, SnapEDA_Link=https://www.snapeda.com/parts/PBO-5-S5/CUI/view-part/2859892/?ref=snap
Q1: library part CMP-2000-06834-2, "MOSFET N-CH 30V 1.7A SSOT3", Continuous Drain Current=1.7A, Drain To Source Breakdown Voltage=30V, Drain To Source Resistance=0.105Ω, Gate To Source Voltage=20V, Input Capacitace At Vds="195pF @ 15V", Manufacturer="ON Semiconductor", Max Forward Diode Voltage=1.2V, Max Junction Temp=+150°C, Package=527AG-01, Power Dissipation=0.46W, Pulse Drain Current=10A, Temperature="-55°C to +150°C", Temperature Range Low=-55°C, Typ Forward Diode Voltage=0.8V, Automotive=No, Category=Trans, ComponentLink2Description=Datasheet, ComponentLink2URL=https://www.onsemi.com/pub/Collateral/NDS355AN-D.PDF, Depletion Mode=False, Device Class L1="Discrete Semiconductors", Device Class L2=Transistors, Device Class L3=MOSFETs, Digikey Description="MOSFET N-CH 30V 1.7A SSOT3", Drain To Source Voltage=30V, Footprint Url=https://www.onsemi.com/pub/Collateral/527AG.PDF, Gate Charge At Vgs="3.5nC @ 5V", Height=1.22mm, Lead Free=Yes, Manufacturer Part Number=NDS355AN, Mouser Description="MOSFET SOT-23 N-CH LOGIC", Number Of Channels=1, Number Of N Channels=1, Octopart=https://octopart.com/nds355an-on+semiconductor-84330922, RoHS=TRUE, Rthja Max=250°C/W, Standoff Height=0.013mm, Temperature Range High=+150°C, Threshold Vgs Max=2V, Threshold Vgs Min=1V, Transconductance=3.5S, Turn Off Delay Time=13ns, Turn On Delay Time=10ns
R1 R7: "Resistor, SMD 220 Ohm 0603  ±  0.1 %, ERA3AEB221V, Panasonic Automotive & Industrial Systems", Case Code (Imperial)=0603, Case Code (Metric)=1608, Manufacturer=Panasonic, Manufacturer Part Number=ERA3AEB221V, Max Operating Temperature=155°C, Max Power Dissipation=100mW, Min Operating Temperature=-55°C, Package Quantity=1, Resistance=220R, Resistance Tolerance=0.1%, Resistor Type="Thin Film", Supplier Part Number 1=P220DBCT-ND, Temperature Coefficient=25ppm/°C, Voltage Rating=75V, Case/Package=0603, Category="Chip SMD Resistors", ComponentLink1Description=https://datasheet.ciiva.com/11808/0900766b80fe20f7-11808055.pdf?src-supplier=RSComponents, ComponentLink1URL=https://datasheet.ciiva.com/11808/0900766b80fe20f7-11808055.pdf?src-supplier=RSComponents, ComponentLink2Description=https://datasheet.ciiva.com/29183/450451-da-01-en-widerstand-0603-era-29183676.pdf?src-supplier=Conrad, ComponentLink2URL=https://datasheet.ciiva.com/29183/450451-da-01-en-widerstand-0603-era-29183676.pdf?src-supplier=Conrad, ComponentLink3Description=https://datasheet.ciiva.com/43455/485442-43455212.pdf?src-supplier=Farnell, ComponentLink3URL=https://datasheet.ciiva.com/43455/485442-43455212.pdf?src-supplier=Farnell, ComponentLink4Description=https://datasheet.ciiva.com/6000/485442-6000910.pdf?src-supplier=Farnell, ComponentLink4URL=https://datasheet.ciiva.com/6000/485442-6000910.pdf?src-supplier=Farnell, ComponentLink5Description=https://datasheet.ciiva.com/9184/aoa0000ce26-9184316.pdf?src-supplier=Avnet, ComponentLink5URL=https://datasheet.ciiva.com/9184/aoa0000ce26-9184316.pdf?src-supplier=Avnet, ComponentLink6Description=https://datasheet.ciiva.com/9117/aoa0000ce26-9117624.pdf?src-supplier=Avnet, ComponentLink6URL=https://datasheet.ciiva.com/9117/aoa0000ce26-9117624.pdf?src-supplier=Avnet, ComponentLink7Description=https://datasheet.ciiva.com/30089/54aoa0000ce26-30089206.pdf?src-supplier=Onlinecomponents.com, ComponentLink7URL=https://datasheet.ciiva.com/30089/54aoa0000ce26-30089206.pdf?src-supplier=Onlinecomponents.com, ComponentLink8Description=https://datasheet.ciiva.com/17206/aoa0000ce26-17206814.pdf?src-supplier=Avnet+Europe, ComponentLink8URL=https://datasheet.ciiva.com/17206/aoa0000ce26-17206814.pdf?src-supplier=Avnet+Europe, ComponentLink9Description=https://datasheet.ciiva.com/48530/era-eng-tds-48530567.pdf?src-supplier=Distrelec, ComponentLink9URL=https://datasheet.ciiva.com/48530/era-eng-tds-48530567.pdf?src-supplier=Distrelec, ComponentLink10Description=https://datasheet.ciiva.com/7886/485442-7886586.pdf?src-supplier=Element14, ComponentLink10URL=https://datasheet.ciiva.com/7886/485442-7886586.pdf?src-supplier=Element14, ComponentLink11Description=https://datasheet.ciiva.com/22739/485442-22739289.pdf?src-supplier=Element14, ComponentLink11URL=https://datasheet.ciiva.com/22739/485442-22739289.pdf?src-supplier=Element14, ComponentLink12Description=https://datasheet.ciiva.com/48425/era-eng-tds-48425439.pdf?src-supplier=Distrelec, ComponentLink12URL=https://datasheet.ciiva.com/48425/era-eng-tds-48425439.pdf?src-supplier=Distrelec, Construction=Rectangular, Contact Plating=Tin, Depth=0.8mm, Features="Automotive AEC-Q200", Height=0.45mm, Lead Free="Lead Free", Length=1.6mm, Military Standard=Not, Mount="Surface Mount", Number of Pins=2, Number of Terminations=2, Packaging="Tape and Reel", Power Rating=100mW, Pricing 1="1=0.31000, 10=0.26000, 100=0.10150, 1000=0.04248, 2500=0.03894 (USD)", Radiation Hardening=No, REACH SVHC="No SVHC", RoHS=Yes, RoHS Compliant=Yes, Series=ERA-3A, Stock 1=28927, Supplier 1=Digi-Key, Technology="METAL FILM", Termination=SMD/SMT, Tolerance=0.1%, Voltage Rating (DC)=75V, Width=0.8mm
R2 R3 R4 R10 R16 R18 R19 R27 R28 R29 R30 R31: "Resistor, SMD 10 kOhm 0603  ±  0.1 %, ERA3ARB103V, Panasonic Automotive & Industrial Systems", Case Code (Imperial)=0603, Case Code (Metric)=1608, Manufacturer=Panasonic, Max Operating Temperature=155°C, Max Power Dissipation=100mW, Min Operating Temperature=-55°C, Package Quantity=5000, Resistance=10kR, Resistance Tolerance=0.1%, Resistor Type="Metal Film,Thin Film", Supplier Part Number 1=P10KBDCT-ND, Temperature Coefficient=10ppm/°C, Voltage Rating=75V, Voltage Rating (DC)=150V, Case/Package=0603, Category="Chip SMD Resistors", ComponentLink1Description=https://datasheet.ciiva.com/48425/era-eng-tds-48425501.pdf?src-supplier=Distrelec, ComponentLink1URL=https://datasheet.ciiva.com/48425/era-eng-tds-48425501.pdf?src-supplier=Distrelec, ComponentLink2Description=https://datasheet.ciiva.com/17212/aoa0000ce26-17212075.pdf?src-supplier=Avnet+Europe, ComponentLink2URL=https://datasheet.ciiva.com/17212/aoa0000ce26-17212075.pdf?src-supplier=Avnet+Europe, Construction=Rectangular, Contact Plating=Tin, Depth=0.8mm, Height=0.022inch, LatestRevisionDate=17-Jul-2002, LatestRevisionNote="Re-released for DXP Platform.", Lead Free="Lead Free", Length=1.6mm, Manufacturer Part Number=ERA-3ARB103V, Military Standard=Not, Mount="Surface Mount", Number of Pins=2, Number of Terminations=2, PackageDescription="Axial Device, Thru-Hole; 2 Leads; 0.3 in Pin Spacing", PackageReference="0603 MET", Packaging="Tape and Reel", Power Rating=100mW, Pricing 1="1=0.72000, 10=0.53000, 100=0.30890, 1000=0.17322, 2500=0.16973 (USD)", Published=8-Jun-2000, Publisher="Altium Limited", Radiation Hardening=No, REACH SVHC="No SVHC", RoHS=Yes, RoHS Compliant=Yes, Series=ERA-3A, Stock 1=16117, Supplier 1=Digi-Key, Termination=SMD/SMT, Tolerance=0.1%, Width=0.031inch
R5 R6 R9 R11 R12 R13 R14: "2k Panasonic Resistor", Supplier Part Number 1=P2.0KBECT-ND, Supplier 1=Digi-Key
R8 R20 R21: "PANASONIC - ERJ-PB3D1001V - CHIP RES, THICK FILM, 1K, 0.2W, 0603", Case Code (Imperial)=0603, Case Code (Metric)=1608, Manufacturer=Panasonic, Max Operating Temperature=155°C, Max Power Dissipation=200mW, Min Operating Temperature=-55°C, Resistance=1kR, Resistor Type="Thick Film", Supplier Part Number 1=P20283CT-ND, Temperature Coefficient=50ppm/°C, Tolerance=0.5%, Case/Package=0603, Category="Chip SMD Resistors", ComponentLink1Description=https://industrial.panasonic.com/cdbs/www-data/pdf/RDM0000/DMM0000COL5.pdf?src-supplier=Digi-Key, ComponentLink1URL=https://industrial.panasonic.com/cdbs/www-data/pdf/RDM0000/DMM0000COL5.pdf?src-supplier=Digi-Key, ComponentLink2Description=https://industrial.panasonic.com/sa/system/files/data/download/catalog/id_fixed-resistors_e_2.pdf?src-supplier=Digi-Key, ComponentLink2URL=https://industrial.panasonic.com/sa/system/files/data/download/catalog/id_fixed-resistors_e_2.pdf?src-supplier=Digi-Key, ComponentLink3Description=http://www.farnell.com/datasheets/2286937.pdf?src-supplier=Newark, ComponentLink3URL=http://www.farnell.com/datasheets/2286937.pdf?src-supplier=Newark, Features="Automotive AEC-Q200", Height - Seated (Max)=0.022inch, Length=0.063inch, Manufacturer Part Number=ERJ-PB3D1001V, Number of Terminations=2, Packaging="Tape and Reel", Pricing 1="1=0.16000, 10=0.13500, 25=0.09840, 50=0.07140, 100=0.05290, 250=0.04060, 500=0.03198, 1000=0.02214 (USD)", RoHS=Yes, Stock 1=4491, Supplier 1=Digi-Key, Width=0.032inch
R15: "Resistor, SMD 220 Ohm 0603  ±  0.1 %, ERA3AEB221V, Panasonic Automotive & Industrial Systems", Supplier Part Number 1=P3.0KAYCT-ND, Supplier 1=Digi-Key
R17: "Resistor, SMD 220 Ohm 0603  ±  0.1 %, ERA3AEB221V, Panasonic Automotive & Industrial Systems", Supplier Part Number 1=RMCF0603JT22R0CT-ND, Supplier 1=Digi-Key
R22 R23 R24: "Resistor, SMD 220 Ohm 0603  ±  0.1 %, ERA3AEB221V, Panasonic Automotive & Industrial Systems", Supplier Part Number 1=P1.0MGCT-ND, Supplier 1=Digi-Key
R25: "Resistor, SMD 220 Ohm 0603  ±  0.1 %, ERA3AEB221V, Panasonic Automotive & Industrial Systems", Supplier Part Number 1=P16.9KHCT-ND, Supplier 1=Digi-Key
R26: "Thick Film Resistors - SMD 3522 12R 5% 3W", Package=2512, Power_Rating="3 W", Resistance=12, Tolerance=5%, Availability=Unavailable, MF="TE Connectivity", Mouser-Purchase-URL=https://snapeda.com/shop?store=Mouser&id=1008159, MP=352212RJT, Price=None, SnapEDA_Link=https://www.snapeda.com/parts/352212RJT/TE%20Connectivity%20Passive%20Product/view-part/1008159/?ref=snap
SW1: library part CMP-03400-000051-1, "SWITCH PIANO DIP SPST 100MA 24V", Contact Current Rating=1A, Contact Resistance=50mR, Flammability Rating="UL94 V-0", Housing Color=Black, Max Current Rating=100mA, Max Operating Temperature=85°C, Max Voltage Rating (DC)=24V, Min Operating Temperature=-30°C, Package Quantity=60, Switching Capacity=400mW, Voltage Rating (DC)=5V, Actuator Length=2.1mm, Actuator Material=Nylon, Actuator Type=PIANO, Contact Material="Copper Alloy", Contact Plating=Gold, Contact Post Length=4mm, Electrical Life=1000Cycles, ELV=Compliant, Height=0.236inch, Housing Material=Polyphenylene, Lead Free="Lead Free", Length=7.06mm, Mount="Through Hole", Number of Circuits=2, Number of Pins=2, Number of Positions=2, Orientation=Straight, Packaging=Rail/Tube, Pitch=0.1inch, Radiation Hardening=No, REACH SVHC="No SVHC", RoHS Compliant=Yes, Sealable="No (Without)", Series="ADP, Alcoswitch", Terminal Pitch=2.54mm, Termination="PC Pins", Throw Configuration=SPST, Type=Switch, Washable=Yes, Width=8.62mm
SW2 SW3 SW4: library part CMP-1677-00003-1, "Ultra-Small Tactile Switch, 1 to 50 mA, 3 to 12 V, -25 to 70 degC, 2-Pin SMD, RoHS, Tape and Reel", Capacitance="470 uF", Case\Package=Radial, Max Operating Temperature="85 degC", Min Operating Temperature="-40 degC", Package Quantity=200, Tolerance=20%, Voltage Rating="50 V", ComponentLink1Description="Manufacturer URL", ComponentLink1URL=http://www.omron.com/, ComponentLink2Description=Datasheet, ComponentLink2URL=https://www.omron.com/ecb/products/pdf/en-b3u.pdf, DatasheetVersion=Jan-15, Diameter="10 mm", Height="20 mm", Lead Pitch="5 mm", Length="20 mm", Mount="Through Hole", PackageDescription="2-Pin Surface Mount Device, Body 4 x 3.2 mm", PackageReference=B3U-3000P, Packaging=Bulk, Pins=2, Radiation Hardening=No, REACH SVHC="No SVHC", RoHSCompliant=true, Voltage Rating (DC)="50 V"
U1: library part CMP-12105-000015-1, "IC MCU 32BIT 128KB FLASH 32QFPN", Ambient Temperature Range High=+85°C, Ambient Temperature Range Low=-40°C, Frequency=80MHz, Manufacturer=STMicroelectronics, Max Junction Temp=+105°C, Max Supply Voltage=3.6V, Min Supply Voltage=1.71V, Package=UFQFPN32-A0B8, Temperature="-40°C to +105°C", Automotive=No, Category=IC, ComponentLink2Description=Datasheet, ComponentLink2URL=https://www.st.com/resource/en/datasheet/stm32l412kb.pdf, Core Architecture="ARM Cortex-M4", Data Bus Width=32bits, Device Class L1="Integrated Circuits (ICs)", Device Class L2="Embedded Processors and Controllers", Device Class L3=Microcontrollers, Digikey Description="IC MCU 32BIT 128KB FLASH 32QFPN", Height=0.6mm, Interface=I2C,SPI,UART,USART,USB,LIN,IrDA,SMBus,Other, Lead Free=Yes, Manufacturer Part Number=STM32L412KBU6, Memory Size=128KBytes, Memory Type=FLASH, Number Of A/D Converters=2, Number Of Adc Channels=10, Number Of Cores=1, Number Of I2C Channels=2, Number Of I/Os=26, Number Of Pwm Channels=11, Number Of Spi Channels=1, Number Of Timers/Counters=7, Number Of Uart Channels=3, Number Of Usb Channels=1, Octopart=https://octopart.com/stm32l412kbu6-stmicroelectronics-94438340, Ram Size=40KBytes, RoHS=TRUE, Temperature Range High=+105°C, Temperature Range Low=-40°C
U2: "ESP-12E WiFi Module", Package=None, Availability=Unavailable, MF="{'manufacturer': u'AI-Thinker'}", MP=ESP8266-12E/ESP-12E, Price=None
U3 U6: library part CMP-0786-00127-1, "500 mA, Low Quiescent Current, CMOS Linear Regulator, 2.3 to 5.5 V Vin, 3.3 V Vout, Industrial, 8-pin SON (CP-8-8), Reel", Manufacturer="Analog Devices", Preset Vout Values (V)=3.3, Supply Current IGND @ Small Load=45uA, ComponentLink1Description="Manufacturer URL", ComponentLink1URL=http://www.analog.com/en/index.html, ComponentLink2Description=Datasheet, ComponentLink2URL=http://www.analog.com/static/imported-files/data_sheets/ADP124_125.pdf, ComponentLink3Description="Package Specification", ComponentLink3URL=http:/www.analog.com/static/imported-files/packages/PKG_PDF/LFCSP(CP)/CP_8_8.pdf, ComponentLink4Description="URL Link1", ComponentLink4URL="Product URL:http://www.analog.com/en/ADP124/productSearch.html", DatasheetVersion="Rev. C", Iout max=500mA, Mounting Technology="Surface Mount", PackageDescription="8-Pin Lead Frame Chip Scale Package, Body 2 x 2 mm, Pitch 0.5 mm", PackageReference=CP-8-8, PackageVersion="101028-A, 10/2008", Packing=Reel, PartNumber=ADP124ACPZ-3.3-R7, Vin (max) (V)=5.5, Vin (min) (V)=2.3
U4: library part CMP-0384-01895-1, "Quad Channel Wide Bandwidth Operational Amplifier, 8.4 MHz BW, 6 V/us SR, Industrial, 14-pin SOP (RU-14), Tube", Amplifiers Per Package=4, Generic Part Number=AD8604, Input Bias Current=200fA, Input Offset Voltage=500uV, Manufacturer="Analog Devices", Code_JEDEC=MO-153AB-1, ComponentLink1Description="Manufacturer URL", ComponentLink1URL=http://www.analog.com/en/index.html, ComponentLink2Description=Datasheet, ComponentLink2URL=http://www.analog.com/static/imported-files/data_sheets/AD8601_8602_8604.pdf, ComponentLink3Description="Package Specification", ComponentLink3URL=http://www.analog.com/static/imported-files/packages/36057385283879153717235186773RU14.pdf, DatasheetVersion="Rev. G", Iq/Amp=1.2mA, Mounting Technology="Surface Mount", PackageDescription="14-Pin Thin Shrink Small Outline Package, Body 5 x 4.4 mm, Pitch 0.65 mm", PackageReference=RU-14, PartNumber=AD8604ARUZ, Slew Rate=6V/us, Small Signal Bandwidth=8.4MHz, V Span Max=6V, V Span Min=2.7V
U5: "General Purpose Digital Isolator 600Vrms 6 Channel 2Mbps, 50Mbps 1.5kV/Âµs CMTI 16-SSOP (0.154, 3.90mm Width)", Package="QSOP-16 Maxim", Availability=Unavailable, MF="Maxim Integrated", MP=MAX14850AEE+, Price=None, SnapEDA_Link=https://www.snapeda.com/parts/MAX14850AEE+/Maxim%20Integrated/view-part/1150679/?ref=snap
X1: library part CMP-2000-05036-1, "Low Frequency Crystal, 32.768 KHz, 6 pF, +/- 20 ppm, -40 to 85 degC, 4-Pin SMD, RoHS, Tape and Reel", Case Height=2.5mm, Case Length=8mm, Case Width=3.8mm, Frequency=32.768kHz, Load Capacitance=6pF, Manufacturer=Abracon, Operating Temperature Range=-40Cto+85C, Package / Case=8mmx3.8mm, Package Description="4-Pin Surface Mount Device, Body 8 x 3.8 mm, Pitch 5.5 mm", Package Reference=ABS25, Tolerance=20PPM, Brand=ABRACON, Datasheet URL=https://datasheet.ciiva.com/854/abs25-854528.pdf, Datasheet Version=Jun-17, Dimensions=3.8mmWx8mmLx2.5mmH, ESR=50kOhms, Factory Pack Quantity=3000, Manufacturer URL=http://www.abracon.com/, Mounting Style=SMD/SMT, Packaging=Reel, Product Category=Crystals, RoHS=Details, Series=ABS25, Termination Style=SMD/SMT, Type=LowFrequencyCrystal

## Free pads (board coordinates)
  round 60 hole 120: 2(5300,4145) 3(5230,1055) 4(7025,1055)

## Via types
v1: diameter 23.62, hole 15.75, Top Layer to Bottom Layer, tented both sides, 133 vias
v2: diameter 19.68, hole 11.81, Top Layer to Bottom Layer, tented both sides, 71 vias
v3: diameter 19.68, hole 7.87, Top Layer to Bottom Layer, 4 vias
v4: diameter 19.68, hole 11.81, Top Layer to Bottom Layer, 3 vias
v5: diameter 23.62, hole 15.75, Top Layer to Bottom Layer, 1 vias

## Nets (pads, with @x,y where several pads share a name; then routed paths per layer and width w, separated by ;. In a path a pad name is that pad's centre, name@x,y a point inside that pad or via, vN(x,y) a via of type N, cw(c..) or ccw(c..) an arc to the next point about the centre after c; other vN are vias at no path point)
3V3_A: C2.1 C4.1 C6.2 C8.1 C16.2 C26.2 C27.1 D1.1 D3.1 R15.2 R23.2 U1.5 U4.4 U6.1 U6.2 | length 3776.8
  Top Layer w10: C16.2 5725.47,3211.97 5725.47,3241.3 ; U6.1 5725.47,3241.3 ; U6.2@5745.16,3269.65 U6.2 5744.25,3269.72 5744.25,3260.08 5725.47,3241.3 ; v2(6078,3850) R23.2
  Top Layer w15: v2(5540,3695) R15.2 ; U4.4 5880,3740 5900,3760 v2(5900,3860) ; C27.1 5880,3896.5 5880,3880 v2(5900,3860) ; C26.2 5918.29,3894.78 5918.29,3878.29 v2(5900,3860) ; D3.1 v2(6420,3895) ; U1.5 6704.84,3849.17 6731,3823.01 v2(6731,3819) ; D1.1 v2(7020,3713) v2@7021,3714
  Top Layer w20: v4(5695,3240) 5695.47,3240 5723.5,3211.97 C16.2
  Bottom Layer w15: C8.1@6590,3853.5 C6.2 C4.1 6730,3853.5 ; v2(6731,3819) 6731,3852.5 6730,3853.5 ; C2.1 6730,3853.5
  Bottom Layer w20: v4@5695.47,3240 5695.47,3304.53 5540,3460 v2(5540,3695) 5540,3850 5600,3910 5850,3910 v2(5900,3860) 6365,3860 ; v2(6420,3895) 6385,3860 ; C8.1@6590,3853.5 6583.5,3860 6385,3860 ; v2(7020,3713) 7020,3670 6850,3500 6515,3500 6365,3650 6365,3860 ; 6365,3860 6385,3860
3V3_D: C3.1 C5.1 C7.2 C9.1 C17.1 C18.1 C24.2 R2.2 R3.2 R4.2 R13.2 R14.2 R27.2 R28.2 U1.1 U1.17 U2.3 U2.8 U3.1 U3.2 U5.1 | length 5946.5